# Altium PCB transformer.PcbDoc
Units mm, origin at the board's own origin, x right, y up, seen from the top; angles counter-clockwise.
Board outline 145 x 85.05 mm, 3 copper layers (Top Layer, Mid-Layer 1, Bottom Layer); 26 components, 3 nets, 28 pads, 396 vias.
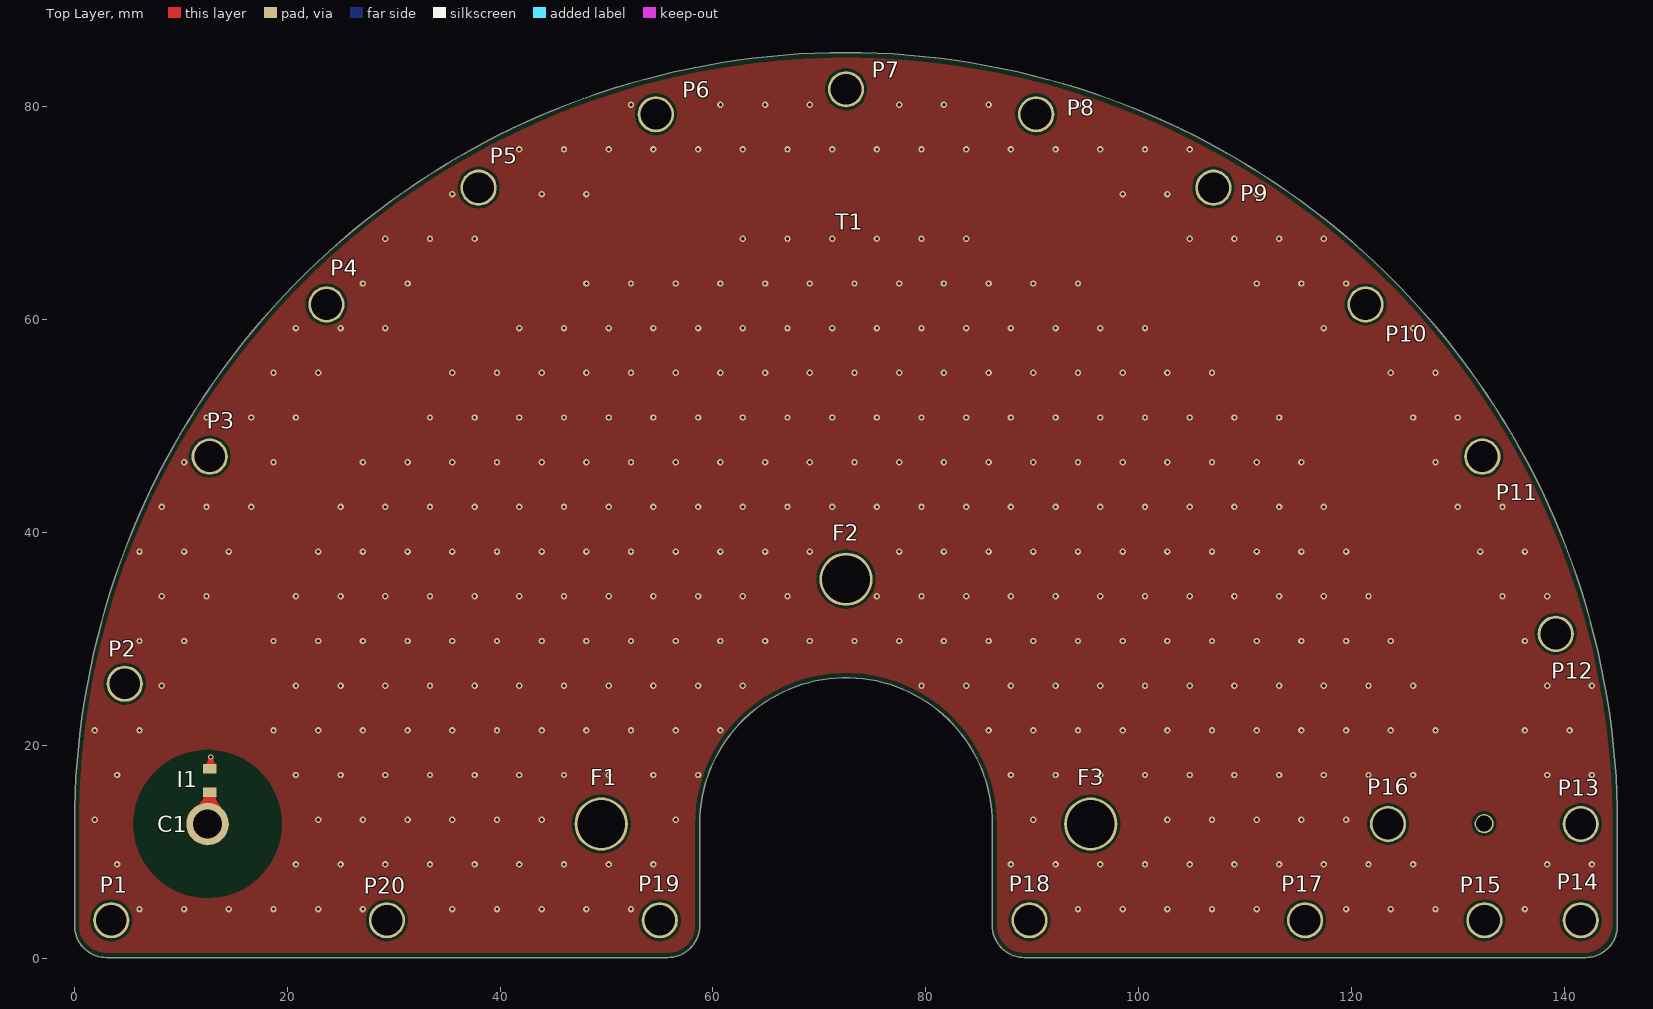
[diagram p0: Top Layer view]
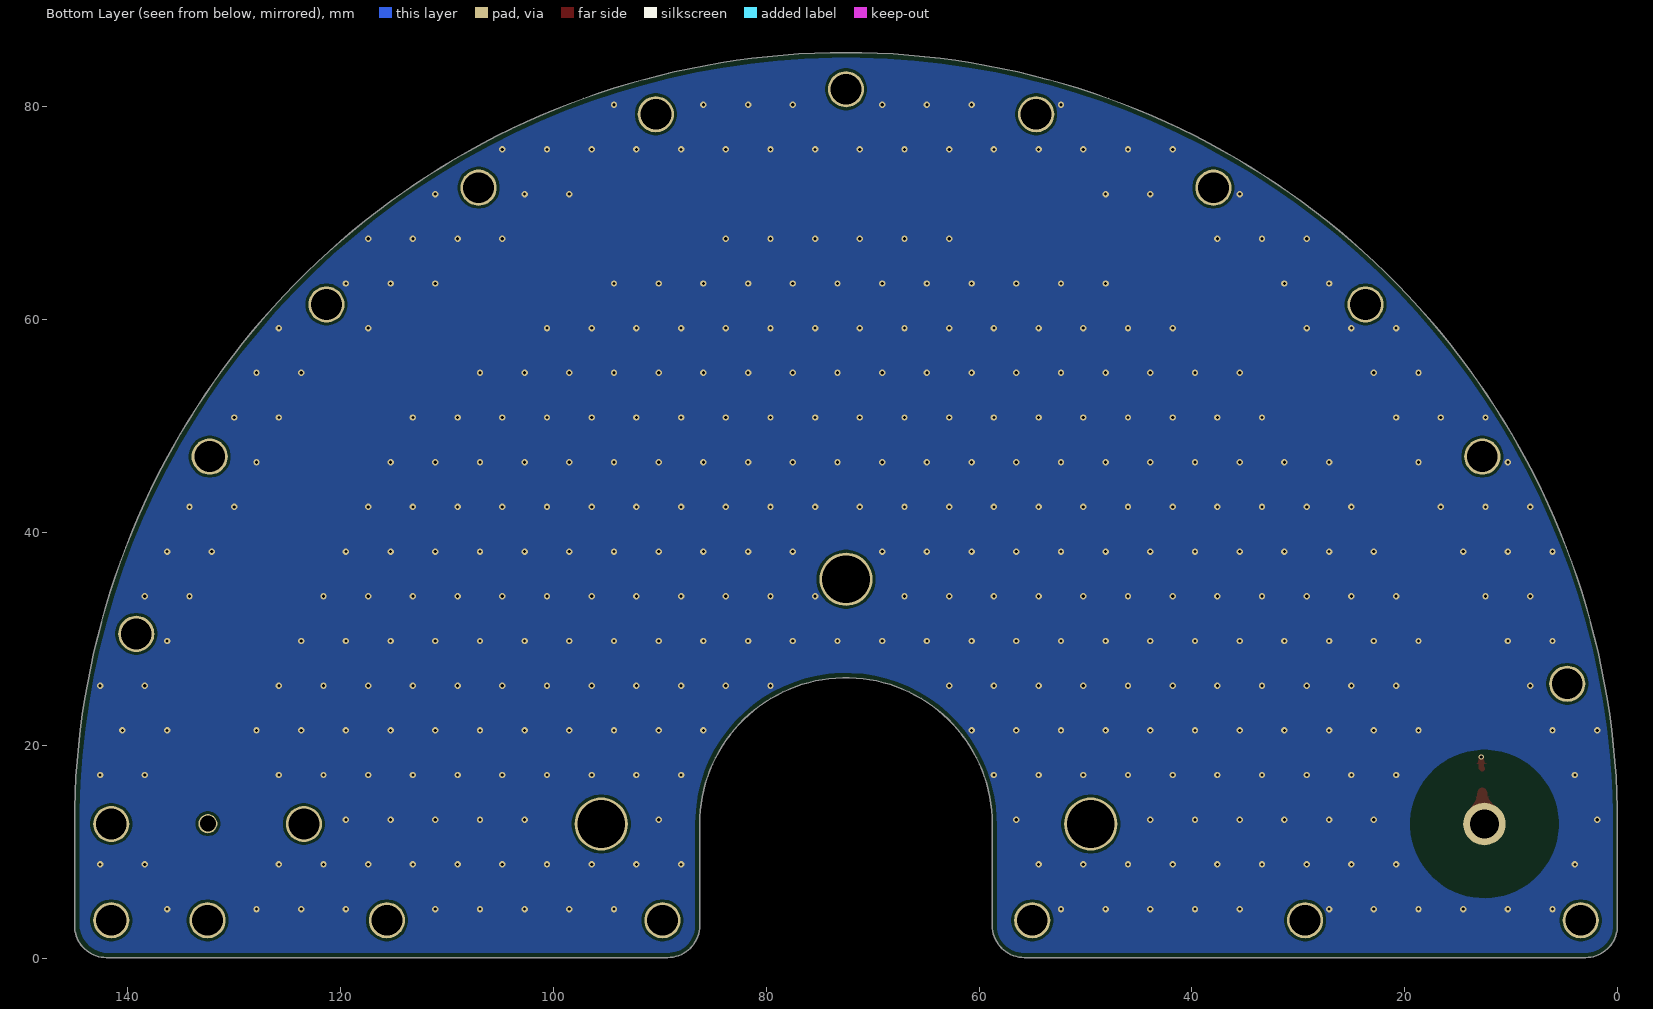
[diagram p1: Bottom Layer view, seen from below]
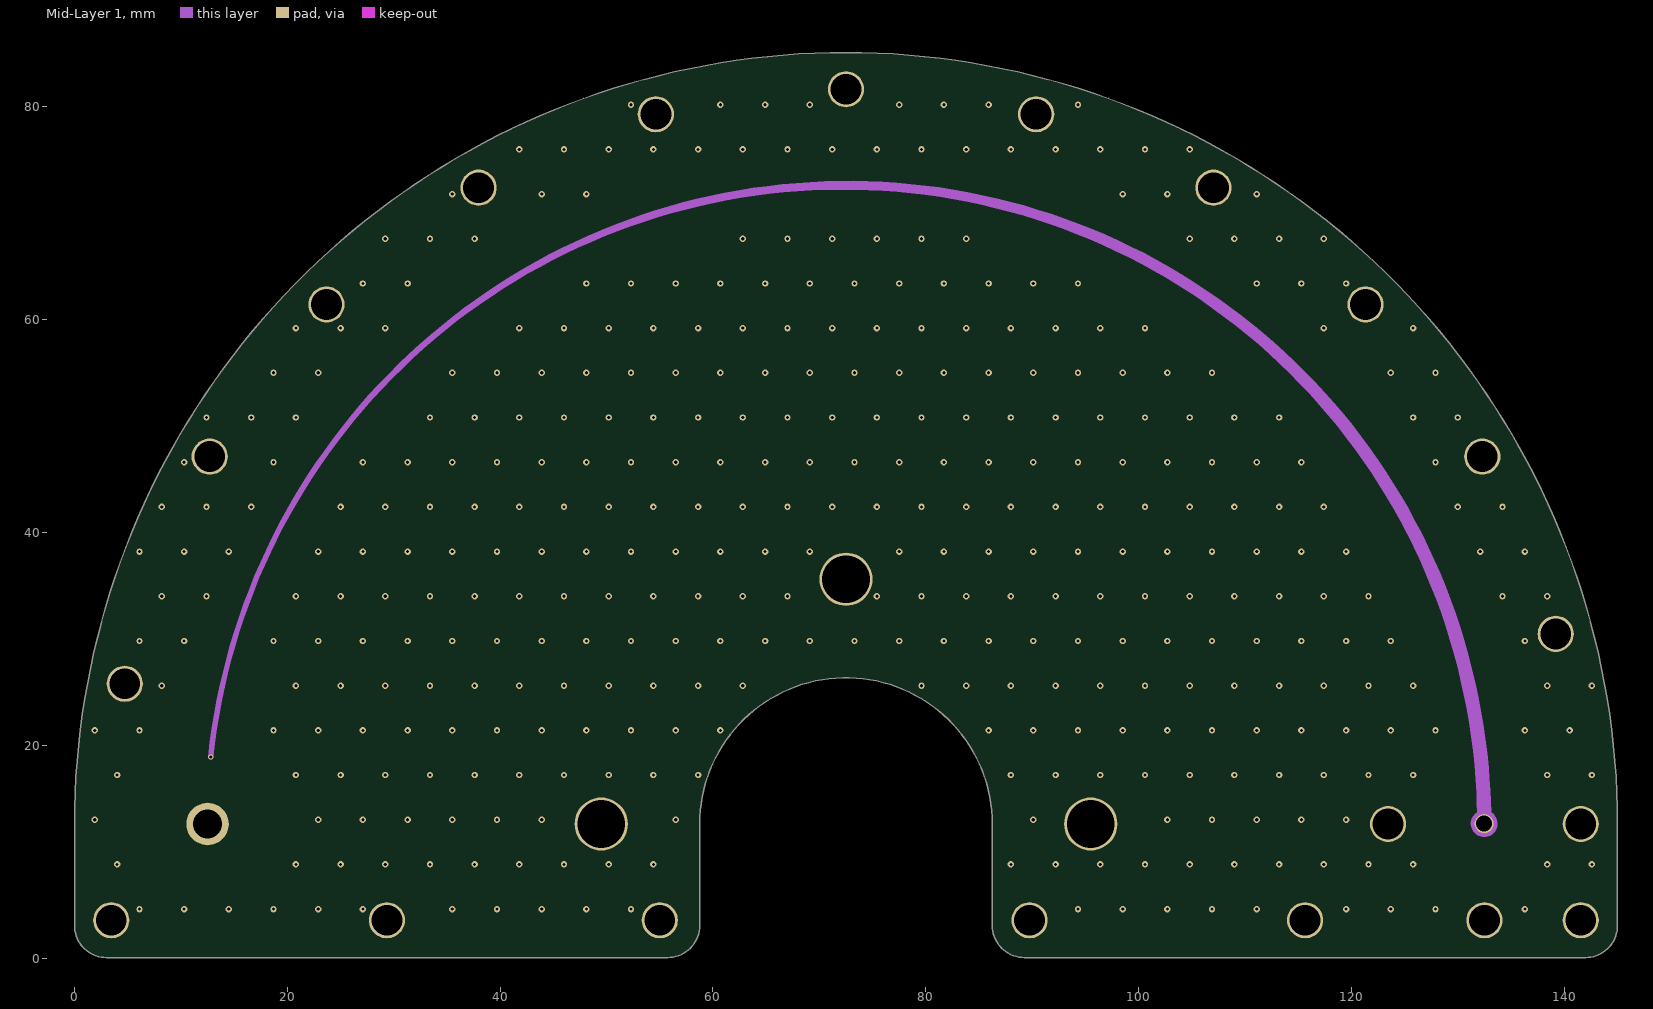
[diagram p2: Mid-Layer 1]

## Layer stack, top to bottom
Top Solder: solder mask 0.0102, Solder Resist, Dk 3.5
Top Layer: signal copper 0.0356
Dielectric 1: dielectric 0.32, FR-4, Dk 4.8
Mid-Layer 1: signal copper 0.0356
Dielectric2: dielectric 0.32, FR-4, Dk 4.8
Bottom Layer: signal copper 0.0356
Bottom Solder: solder mask 0.0102, Solder Resist, Dk 3.5

## Board outline
3,0.049 cw(c3,3.049) 0,3.049 0,12.6 cw(c72.5,12.6) 145,12.6 145,3.049 cw(c142,3.049) 142,0.049 89.25,0.049 cw(c89.25,3.049) 86.25,3.049 86.25,12.6 ccw(c72.5,12.6) 58.75,12.6 58.75,3.049 cw(c55.75,3.049) 55.75,0.049

## Design rules (kind name [scope] priority, off if disabled: settings)
Clearance [All] p1: gap=0 ignorepadtopadclearanceinfootprint=FALSE
PlaneClearance [All] p1: clearance=0.5
PlaneConnect [All] p1: planeconnectstyle=Direct reliefexpansion=0.508 reliefentries=4 reliefconductorwidth=0.254 reliefairgap=0.254
PolygonConnect [All] p1: connectstyle=Direct reliefconductorwidth=0.254 reliefentries=4 polygonreliefangle="90 Angle" airgapwidth=0.254
RoutingVias [All] p1: holewidth=0.3 width=0.3 viastyle="Through Hole" minholewidth=0.3 minwidth=0.3 maxholewidth=0.3 maxwidth=0.3
SolderMaskExpansion [All] p1: expansion=0.102 istentingtop=FALSE
Width [All] p1: maxlimit=1.25 minlimit=0.254 preferedwidth=0.254
28 further rules are at their usual default settings.

## Components (designator, comment, footprint, x,y, rotation, side; value= is the part's Value field where it differs from the comment)
C1 "Cabel" pad_type3 12.5,12.6 r0 top
F1 "Pad_type2" pad_type2 49.5,12.6 r0 top
F2 "Pad_type2" pad_type2 72.5,35.6 r0 top
F3 "Pad_type2" pad_type2 95.5,12.6 r0 top
I1 "Inductor" Inductor 12.7,17.8 r180 top
P1 "Pad_type1" pad_type1 3.449,3.549 r0 top
P2 "Pad_type1" pad_type1 4.718,25.776 r0 top
P3 "Pad_type1" pad_type1 12.7,47.125 r0 top
P4 "Pad_type1" pad_type1 23.674,61.426 r0 top
P5 "Pad_type1" pad_type1 37.975,72.4 r0 top
P6 "Pad_type1" pad_type1 54.628,79.298 r0 top
P7 "Pad_type1" pad_type1 72.5,81.651 r0 top
P8 "Pad_type1" pad_type1 90.372,79.298 r0 top
P9 "Pad_type1" pad_type1 107.025,72.4 r0 top
P10 "Pad_type1" pad_type1 121.326,61.426 r0 top
P11 "Pad_type1" pad_type1 132.3,47.125 r0 top
P12 "Pad_type1" pad_type1 139.198,30.472 r0 top
P13 "Pad_type1" pad_type1 141.551,12.6 r0 top
P14 "Pad_type1" pad_type1 141.551,3.549 r0 top
P15 "Pad_type1" pad_type1 132.5,3.549 r0 top
P16 "Pad_type1" pad_type1 123.449,12.6 r0 top
P17 "Pad_type1" pad_type1 115.65,3.549 r0 top
P18 "Pad_type1" pad_type1 89.75,3.549 r0 top
P19 "Pad_type1" pad_type1 55,3.549 r0 top
P20 "Pad_type1" pad_type1 29.35,3.549 r0 top
T1 "Transformator" tr_all 132.471,12.628 r0 top

## Footprints (in the part's own frame and the unit in brackets; to place one, negate y for a bottom-side part, rotate by r counter-clockwise, add the part's x,y. Pads: shape width x height; smd on the part's side, far side on the other; paste and mask are expansions set on the pad)
Inductor [mm]
  rect 1.3x0.9 smd: 1(0,0) 2(0,2.2)
pad_type1 [mm]
  round 3.4 hole 2.9: 1(0,0)
pad_type2 [mm]
  round 5 hole 4.5: 1(0,0)
pad_type3 [mm]
  round 4 hole 2.7: 1(0,0)
tr_all [mm]
  round 1.8 hole 1.5: 1(0,0)
  round 0.5 hole 0.3: 2(-119.671,6.272)
  Mid-Layer 1 region: -119.899,6.296 -119.886,6.195 -119.832,6.109 -119.745,6.056 -119.644,6.045 -119.548,6.079 -119.477,6.152 -119.444,6.248 -119.444,6.248 -109.274,33.803 -87.17,53.147 -58.509,59.574 -30.262,51.521 -9.299,30.948 -0.718,2.857 -0.718,2.857 -0.684,1.958 -0.664,1.059 -0.664,1.059 -1.101,0.591 -1.25,-0.032 -1.07,-0.646 -0.61,-1.091 0.01,-1.25 0.628,-1.081 1.08,-0.629 1.25,-0.011 1.092,0.609 0.647,1.07 0.647,1.07 0.568,3.166 0.416,5.258 0.416,5.258 -9.209,33.046 -30.809,53.001 -59.27,60.401 -87.855,53.493 -109.795,33.913 -119.899,6.296

## Via types
v1: diameter 0.6, hole 0.3, Top Layer to Bottom Layer, 396 vias

## Nets (pads, with @x,y where several pads share a name; then routed paths per layer and width w, separated by ;. In a path a pad name is that pad's centre, name@x,y a point inside that pad or via, vN(x,y) a via of type N, cw(c..) or ccw(c..) an arc to the next point about the centre after c; other vN are vias at no path point)
GND: 
  other v1: 6.1,4.6 10.3,4.6 14.5,4.6 18.7,4.6 22.9,4.6 27.1,4.6 35.5,4.6 39.7,4.6 43.9,4.6 48.1,4.6 52.3,4.6 94.3,4.6 98.5,4.6 102.7,4.6 106.9,4.6 111.1,4.6 119.5,4.6 123.7,4.6 127.9,4.6 136.3,4.6 4,8.8 20.8,8.8 25,8.8 29.2,8.8 33.4,8.8 37.6,8.8 41.8,8.8 46,8.8 50.2,8.8 54.4,8.8 88,8.8 92.2,8.8 96.4,8.8 100.6,8.8 104.8,8.8 109,8.8 113.2,8.8 117.4,8.8 121.6,8.8 125.8,8.8 138.4,8.8 142.6,8.8 1.9,13 22.9,13 27.1,13 31.3,13 35.5,13 39.7,13 43.9,13 56.5,13 90.1,13 102.7,13 106.9,13 111.1,13 115.3,13 119.5,13 4,17.2 20.8,17.2 25,17.2 29.2,17.2 33.4,17.2 37.6,17.2 41.8,17.2 46,17.2 50.2,17.2 54.4,17.2 58.6,17.2 88,17.2 92.2,17.2 96.4,17.2 100.6,17.2 104.8,17.2 109,17.2 113.2,17.2 117.4,17.2 121.6,17.2 125.8,17.2 138.4,17.2 142.6,17.2 1.9,21.4 6.1,21.4 18.7,21.4 22.9,21.4 27.1,21.4 31.3,21.4 35.5,21.4 39.7,21.4 43.9,21.4 48.1,21.4 52.3,21.4 56.5,21.4 60.7,21.4 85.9,21.4 90.1,21.4 94.3,21.4 98.5,21.4 102.7,21.4 106.9,21.4 111.1,21.4 115.3,21.4 119.5,21.4 123.7,21.4 127.9,21.4 136.3,21.4 140.5,21.4 8.2,25.6 20.8,25.6 25,25.6 29.2,25.6 33.4,25.6 37.6,25.6 41.8,25.6 46,25.6 50.2,25.6 54.4,25.6 58.6,25.6 62.8,25.6 79.6,25.6 83.8,25.6 88,25.6 92.2,25.6 96.4,25.6 100.6,25.6 104.8,25.6 109,25.6 113.2,25.6 117.4,25.6 121.6,25.6 125.8,25.6 138.4,25.6 142.6,25.6 6.1,29.8 10.3,29.8 18.7,29.8 22.9,29.8 27.1,29.8 31.3,29.8 35.5,29.8 39.7,29.8 43.9,29.8 48.1,29.8 52.3,29.8 56.5,29.8 60.7,29.8 64.9,29.8 69.1,29.8 73.3,29.8 77.5,29.8 81.7,29.8 85.9,29.8 90.1,29.8 94.3,29.8 98.5,29.8 102.7,29.8 106.9,29.8 111.1,29.8 115.3,29.8 119.5,29.8 123.7,29.8 136.3,29.8 8.2,34 12.4,34 20.8,34 25,34 29.2,34 33.4,34 37.6,34 41.8,34 46,34 50.2,34 54.4,34 58.6,34 62.8,34 67,34 75.4,34 79.6,34 83.8,34 88,34 92.2,34 96.4,34 100.6,34 104.8,34 109,34 113.2,34 117.4,34 121.6,34 134.2,34 138.4,34 6.1,38.2 10.3,38.2 14.5,38.2 22.9,38.2 27.1,38.2 31.3,38.2 35.5,38.2 39.7,38.2 43.9,38.2 48.1,38.2 52.3,38.2 56.5,38.2 60.7,38.2 64.9,38.2 69.1,38.2 77.5,38.2 81.7,38.2 85.9,38.2 90.1,38.2 94.3,38.2 98.5,38.2 102.7,38.2 106.9,38.2 111.1,38.2 115.3,38.2 119.5,38.2 132.1,38.2 136.3,38.2 8.2,42.4 12.4,42.4 16.6,42.4 25,42.4 29.2,42.4 33.4,42.4 37.6,42.4 41.8,42.4 46,42.4 50.2,42.4 54.4,42.4 58.6,42.4 62.8,42.4 67,42.4 71.2,42.4 75.4,42.4 79.6,42.4 83.8,42.4 88,42.4 92.2,42.4 96.4,42.4 100.6,42.4 104.8,42.4 109,42.4 113.2,42.4 117.4,42.4 130,42.4 134.2,42.4 10.3,46.6 18.7,46.6 27.1,46.6 31.3,46.6 35.5,46.6 39.7,46.6 43.9,46.6 48.1,46.6 52.3,46.6 56.5,46.6 60.7,46.6 64.9,46.6 69.1,46.6 73.3,46.6 77.5,46.6 81.7,46.6 85.9,46.6 90.1,46.6 94.3,46.6 98.5,46.6 102.7,46.6 106.9,46.6 111.1,46.6 115.3,46.6 127.9,46.6 12.4,50.8 16.6,50.8 20.8,50.8 33.4,50.8 37.6,50.8 41.8,50.8 46,50.8 50.2,50.8 54.4,50.8 58.6,50.8 62.8,50.8 67,50.8 71.2,50.8 75.4,50.8 79.6,50.8 83.8,50.8 88,50.8 92.2,50.8 96.4,50.8 100.6,50.8 104.8,50.8 109,50.8 113.2,50.8 125.8,50.8 130,50.8 18.7,55 22.9,55 35.5,55 39.7,55 43.9,55 48.1,55 52.3,55 56.5,55 60.7,55 64.9,55 69.1,55 73.3,55 77.5,55 81.7,55 85.9,55 90.1,55 94.3,55 98.5,55 102.7,55 106.9,55 123.7,55 127.9,55 20.8,59.2 25,59.2 29.2,59.2 41.8,59.2 46,59.2 50.2,59.2 54.4,59.2 58.6,59.2 62.8,59.2 67,59.2 71.2,59.2 75.4,59.2 79.6,59.2 83.8,59.2 88,59.2 92.2,59.2 96.4,59.2 100.6,59.2 117.4,59.2 125.8,59.2 27.1,63.4 31.3,63.4 48.1,63.4 52.3,63.4 56.5,63.4 60.7,63.4 64.9,63.4 69.1,63.4 73.3,63.4 77.5,63.4 81.7,63.4 85.9,63.4 90.1,63.4 94.3,63.4 111.1,63.4 115.3,63.4 119.5,63.4 29.2,67.6 33.4,67.6 37.6,67.6 62.8,67.6 67,67.6 71.2,67.6 75.4,67.6 79.6,67.6 83.8,67.6 104.8,67.6 109,67.6 113.2,67.6 117.4,67.6 35.5,71.8 43.9,71.8 48.1,71.8 98.5,71.8 102.7,71.8 111.1,71.8 41.8,76 46,76 50.2,76 54.4,76 58.6,76 62.8,76 67,76 71.2,76 75.4,76 79.6,76 83.8,76 88,76 92.2,76 96.4,76 100.6,76 104.8,76 52.3,80.2 60.7,80.2 64.9,80.2 69.1,80.2 77.5,80.2 81.7,80.2 85.9,80.2 94.3,80.2
NetC1_1: C1.1 I1.2 | length 3.1
  Top Layer w0.254: C1.1 C1.1@12.7,12.8
  Top Layer w0.9: C1.1@12.7,12.8 I1.2
NetI1_1: I1.1 T1.2 | length 1.1
  Top Layer w0.5: I1.1 12.8,17.9 T1.2
pads on no net: F1.1 F2.1 F3.1 P1.1 P2.1 P3.1 P4.1 P5.1 P6.1 P7.1 P8.1 P9.1 P10.1 P11.1 P12.1 P13.1 P14.1 P15.1 P16.1 P17.1 P18.1 P19.1 P20.1 T1.1

## Polygon pours and split planes (outlines as drawn)
GND on Bottom Layer "GND_L03_P002" (solid, pour order 2): 0.451,3.049 0.451,12.6 cw(c72.475,12.575) 72.5,84.6 cw(c72.5,12.6) 144.5,12.6 144.5,3.049 cw(c141.831,3.166) 142,0.5 115.6,0.5 89.3,0.5 cw(c89.227,3.027) 86.7,2.953 86.7,12.7 ccw(c72.55,12.65) 72.5,26.8 ccw(c72.5,12.6) 58.3,12.594 58.301,7.809 58.3,2.953 cw(c55.811,2.99) 55.806,0.5 42.553,0.498 29.3,0.5 3,0.5 cw(c3,3.049)
GND on Top Layer "GND_L01_P003" (solid, pour order 3): 0.45,3.049 0.45,12.6 cw(c72.475,12.575) 72.5,84.6 cw(c72.55,12.65) 144.5,12.7 144.5,3.1 cw(c141.802,3.191) 142,0.499 115.7,0.499 89.25,0.499 cw(c89.25,3.049) 86.7,3.049 86.7,12.6 ccw(c72.5,12.6) 72.5,26.8 ccw(c72.475,12.625) 58.3,12.65 58.3,3 cw(c55.799,3) 55.799,0.499 29.4,0.499 3,0.499 cw(c3,3.049)

## Other copper
Top Layer:
  pour cut-out: 16.204,18.496 cw(c12.501,12.601) 18.396,16.304 cw(c12.5,12.6) 18.396,8.896 cw(c12.5,12.6) 15.521,6.327 cw(c12.5,12.601) 8.796,6.704 cw(c12.499,12.599) 6.604,8.896 cw(c12.501,12.6) 6.604,16.304 cw(c12.499,12.601) 8.795,18.496 cw(c12.5,12.6)
Bottom Layer:
  pour cut-out: 16.204,18.496 cw(c12.501,12.601) 18.396,16.304 cw(c12.5,12.6) 18.396,8.896 cw(c12.5,12.6) 15.521,6.327 cw(c12.5,12.601) 8.796,6.704 cw(c12.499,12.599) 6.604,8.896 cw(c12.501,12.6) 6.604,16.304 cw(c12.499,12.601) 8.795,18.496 cw(c12.5,12.6)

## Silkscreen, mask and mechanical layers (free items; w line width, h text height)
Mechanical 1:
  circle w0.013: c95.5,12.6 r2.25
  circle w0.013: c123.449,12.6 r1.45
  circle w0.013: c141.551,12.6 r1.45
  circle w0.013: c132.5,3.549 r1.45
  circle w0.013: c72.5,35.6 r2.25
  circle w0.013: c49.5,12.6 r2.25
  circle w0.013: c132.5,12.6 r0.75
  circle w0.013: c3.449,3.549 r1.45
  circle w0.013: c121.326,61.426 r1.45
  circle w0.013: c132.3,47.125 r1.45
  circle w0.013: c139.198,30.472 r1.45
  circle w0.013: c89.75,3.549 r1.45
  circle w0.013: c115.65,3.549 r1.45
  circle w0.013: c55.25,3.549 r1.45
  circle w0.013: c29.35,3.549 r1.45
  circle w0.013: c12.5,12.6 r1.35
  circle w0.013: c141.551,3.549 r1.45
  circle w0.013: c12.7,47.125 r1.45
  circle w0.013: c23.674,61.426 r1.45
  circle w0.013: c37.975,72.4 r1.45
  circle w0.013: c54.628,79.298 r1.45
  circle w0.013: c72.5,81.651 r1.45
  circle w0.013: c90.372,79.298 r1.45
  circle w0.013: c107.025,72.4 r1.45
  circle w0.013: c4.718,25.776 r1.45
  lines w0.013: 0,3.049 ccw(c3,3.049) 3,0.049 55.75,0.049 ccw(c55.75,3.049) 58.75,3.049 58.75,12.6 cw(c72.5,12.6) 86.25,12.6 86.25,3.049 ccw(c89.25,3.049) 89.25,0.049 142,0.049 ccw(c142,3.049) 145,3.049 145,12.6 ccw(c72.5,12.6) 0,12.6 0,3.049
Mechanical 2:
  circle w0.013: c12.5,12.6 r7.225
  circle w0.013: c12.5,12.6 r2
  circle w0.013: c12.5,12.6 r1.35
  circle w0.013: c123.449,12.6 r1.45
  circle w0.013: c141.551,12.6 r1.45
  circle w0.013: c132.5,3.549 r1.45
  circle w0.013: c72.5,35.6 r2.25
  circle w0.013: c95.5,12.6 r2.25
  circle w0.013: c49.5,12.6 r2.25
  circle w0.013: c132.5,12.6 r0.75
  circle w0.013: c3.449,3.549 r1.45
  circle w0.013: c121.326,61.426 r1.45
  circle w0.013: c132.3,47.125 r1.45
  circle w0.013: c139.198,30.472 r1.45
  circle w0.013: c89.75,3.549 r1.45
  circle w0.013: c115.65,3.549 r1.45
  circle w0.013: c55.25,3.549 r1.45
  circle w0.013: c29.35,3.549 r1.45
  circle w0.013: c141.551,3.549 r1.45
  circle w0.013: c12.7,47.125 r1.45
  circle w0.013: c23.674,61.426 r1.45
  circle w0.013: c37.975,72.4 r1.45
  circle w0.013: c54.628,79.298 r1.45
  circle w0.013: c72.5,81.651 r1.45
  circle w0.013: c90.372,79.298 r1.45
  circle w0.013: c107.025,72.4 r1.45
  circle w0.013: c4.718,25.776 r1.45
  circle w0.013: c12.5,12.6 r7.225
  lines w0.013: 0,3.049 ccw(c3,3.049) 3,0.049 55.75,0.049 ccw(c55.75,3.049) 58.75,3.049 58.75,12.6 cw(c72.5,12.6) 86.25,12.6 86.25,3.049 ccw(c89.25,3.049) 89.25,0.049 142,0.049 ccw(c142,3.049) 145,3.049 145,12.6 ccw(c72.5,12.6) 0,12.6 0,3.049
Mechanical 3:
  circle w0.013: c12.804,18.904 r0.15
  circle w0.013: c132.476,12.632 r0.75
  circle w0.013: c95.5,12.6 r2.25
  circle w0.013: c72.5,35.6 r2.25
  circle w0.013: c49.5,12.6 r2.25
  lines w0.013: 9.593,19.242 cw(c72.684,12.596) 135.88,18.153 ; 12.577,18.928 ccw(c12.804,18.904) 13.032,18.88 ; 16.015,18.567 cw(c72.266,12.672) 128.762,15.347 ; 128.761,15.354 cw(c73.254,12.858) 128.811,13.648 ; 130.11,16.401 ccw(c132.476,12.632) 134.779,16.44 ; 135.88,18.16 cw(c73.04,12.485) 136.123,13.762